# EAGLE board sensor_board009 (EAGLE 4.16)
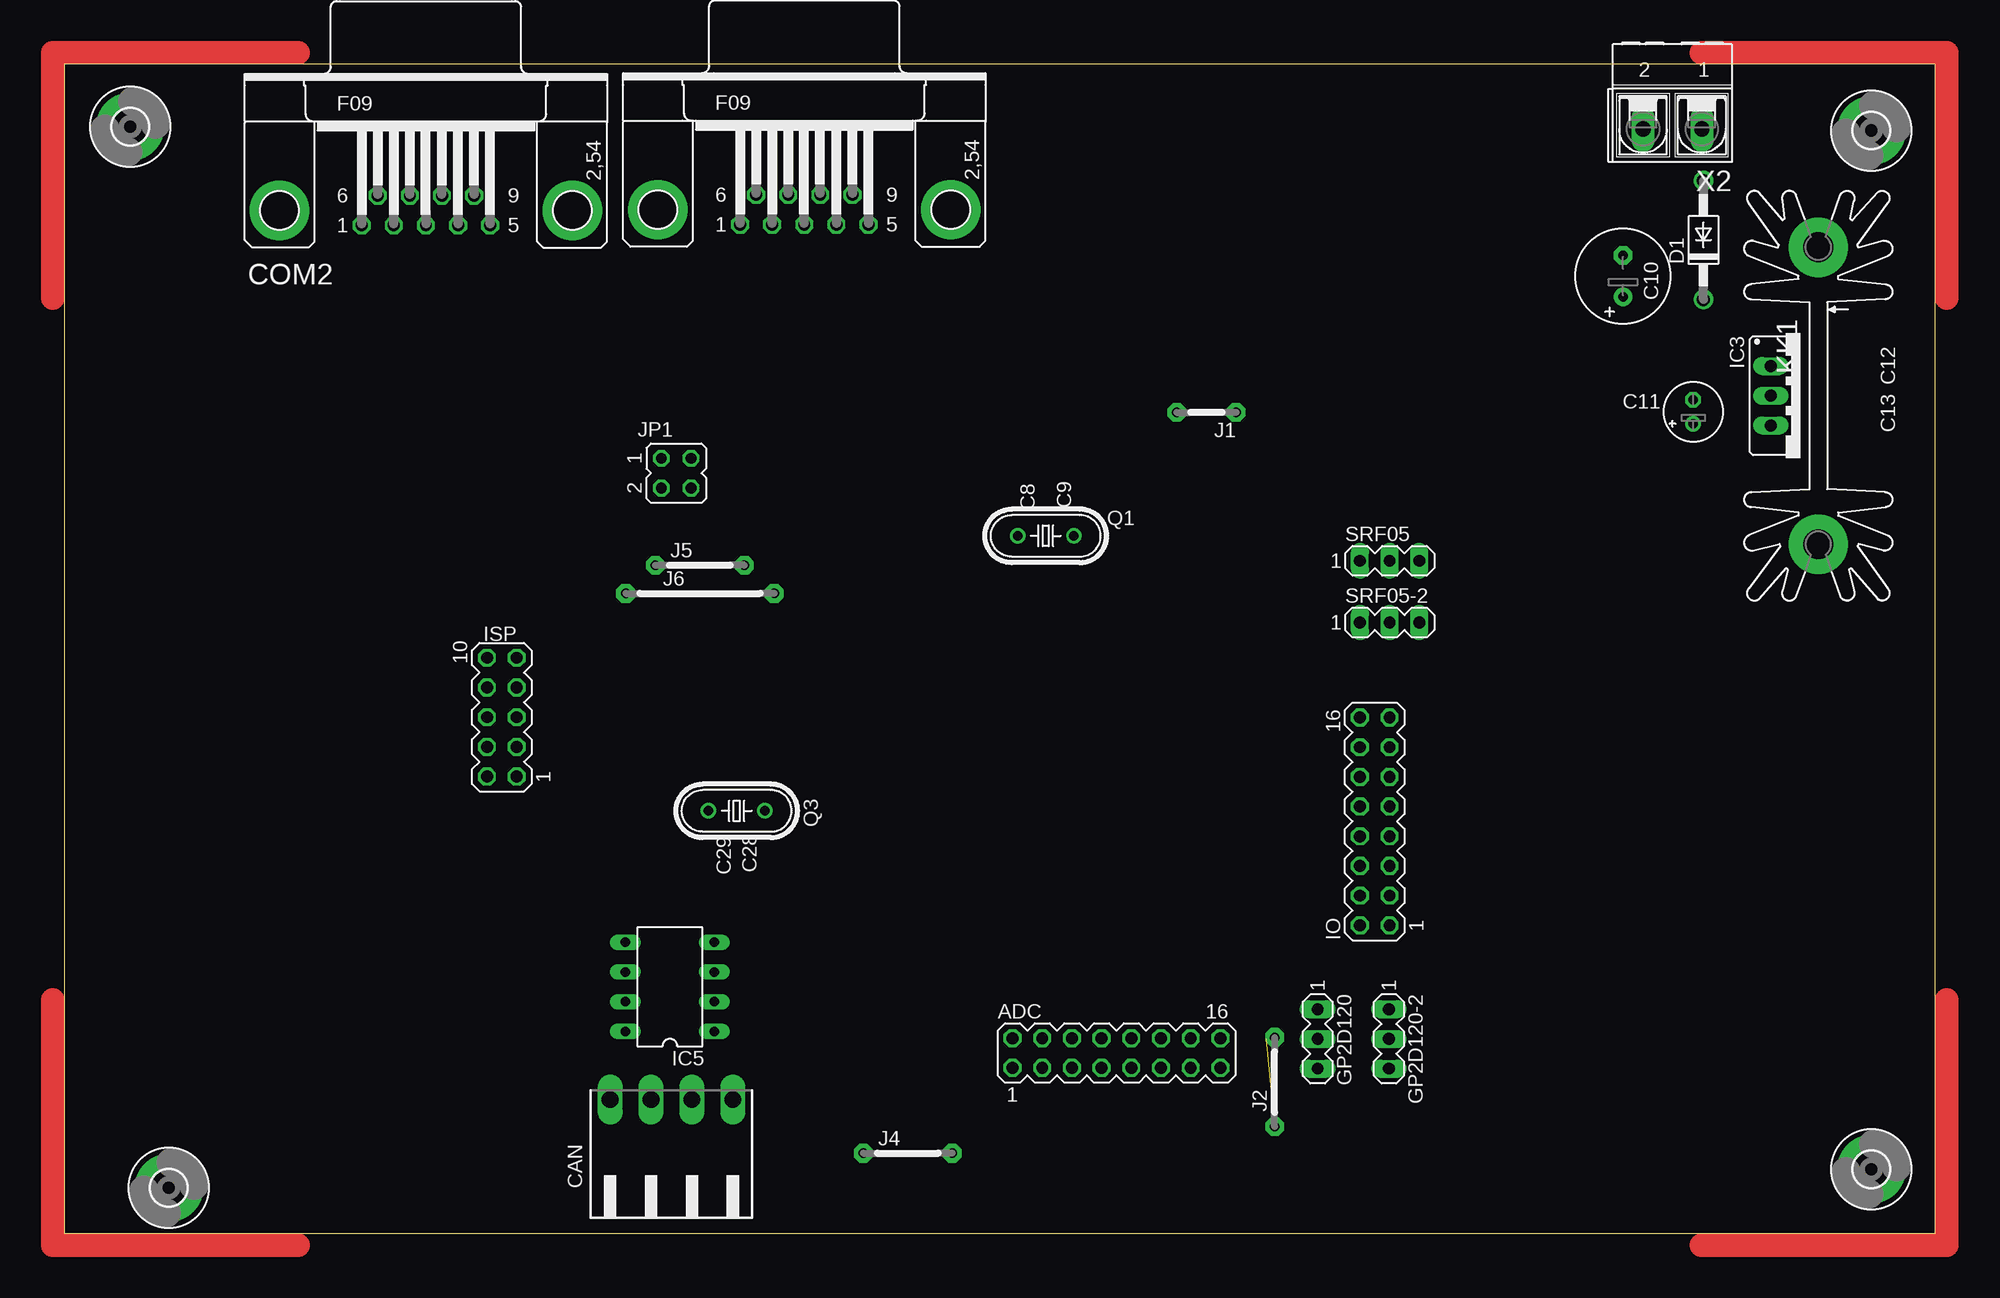
[diagram p0: board, top side]
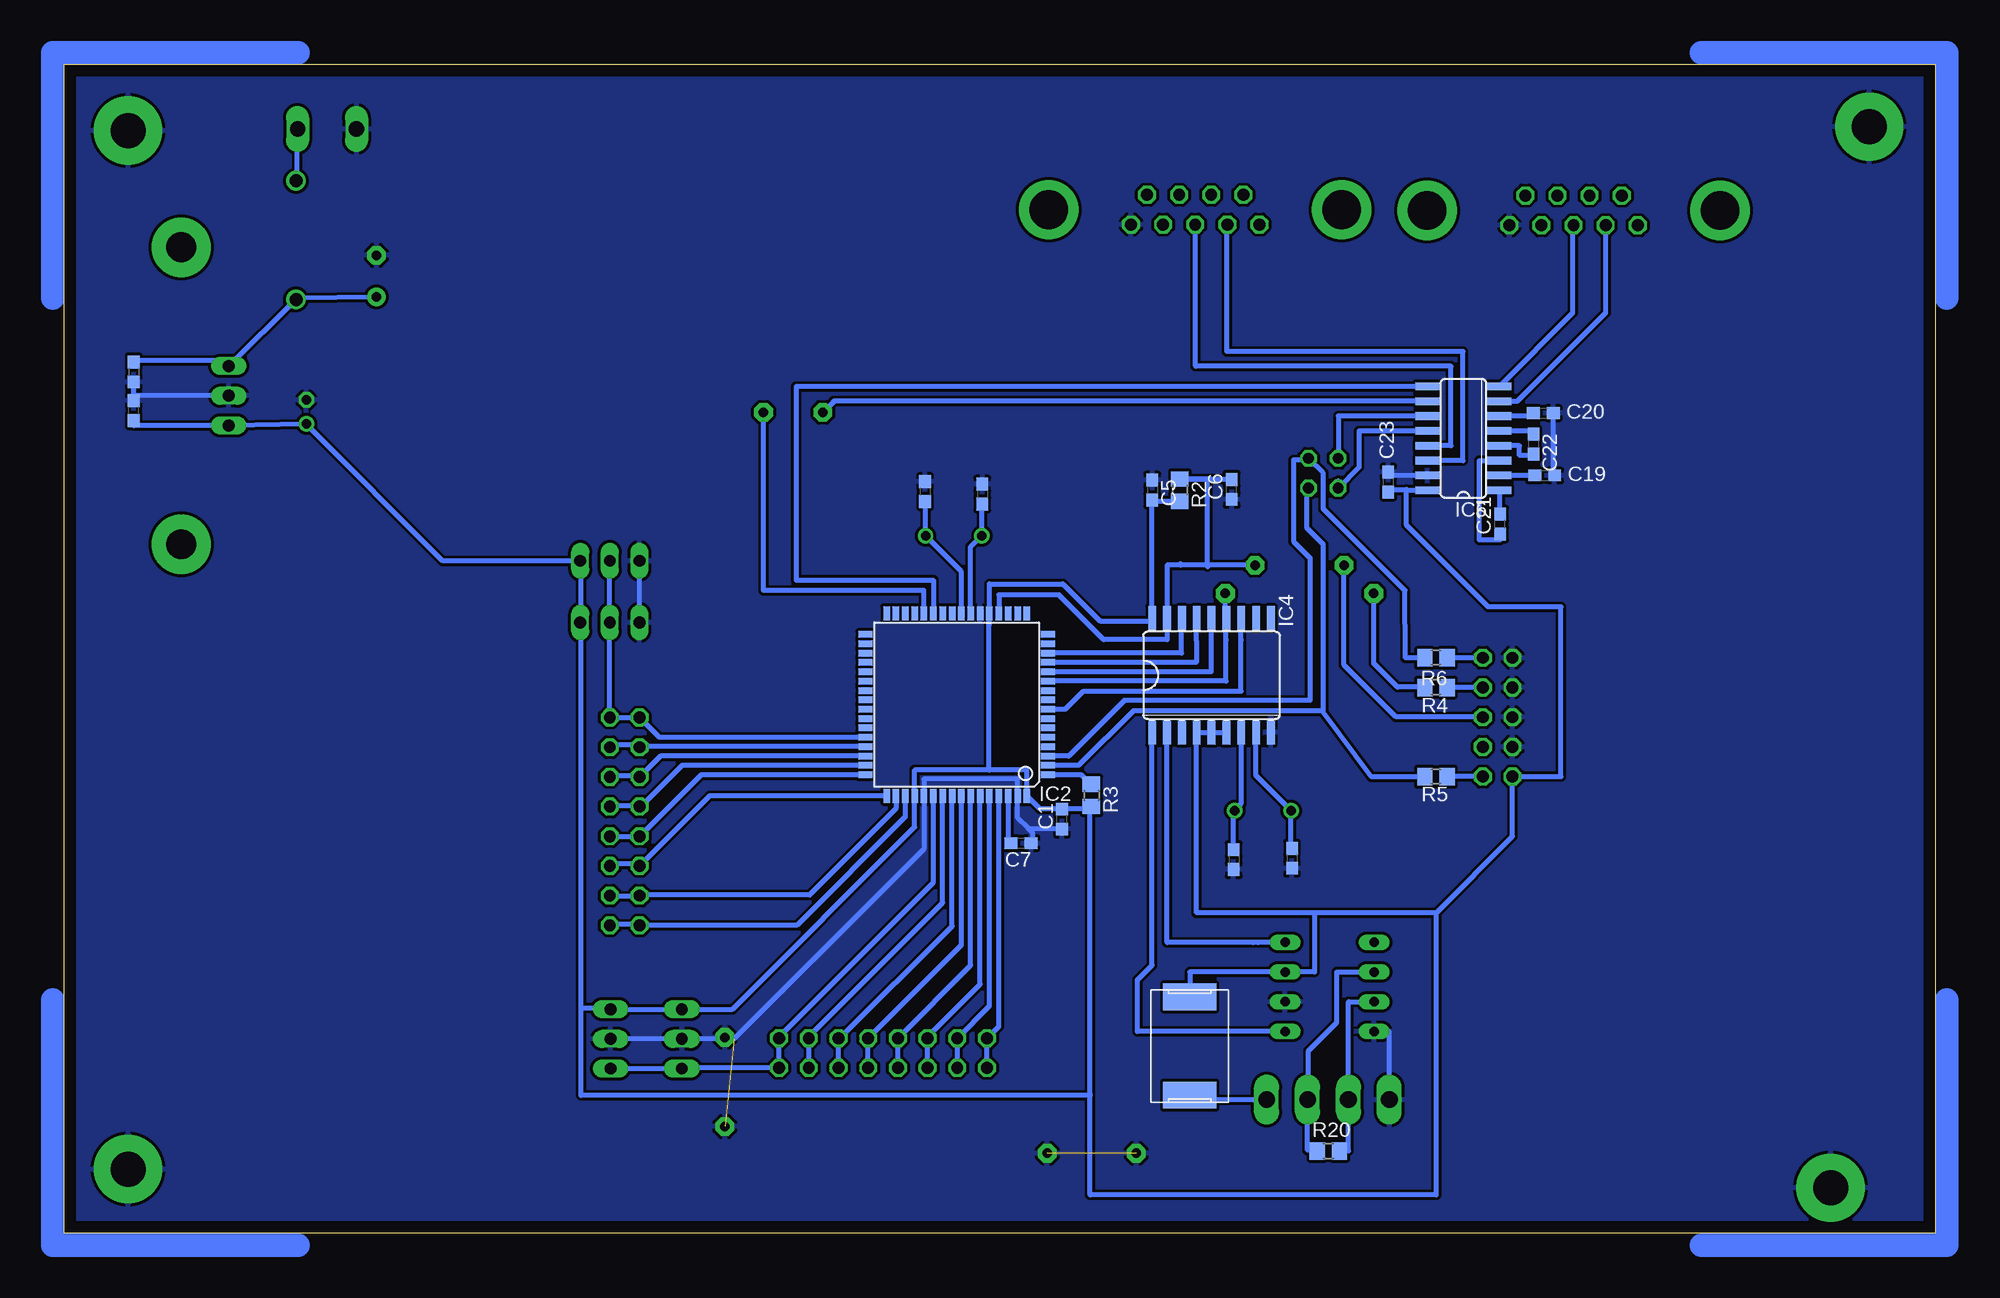
[diagram p1: board, bottom side, seen from below]

Size 160 x 100 mm. Coordinates in mm from the lower left corner, seen from the top.
Outline: 0,0 160,0 160,100 0,100 0,0
Copper layers (1*16): Top 0.035mm / dielectric 1.5mm / Bottom 0.035mm
Design rules "olimex_8mils": minimum track width 10mil, minimum drill 24mil, track to track 8mil, track to pad 8mil, pad to pad 8mil, via to via 8mil, smd to smd 8mil, copper to edge 40mil, drill to drill 10mil, minimum pad ring 10mil, minimum via ring 8mil, stop-mask expansion 0mil, vias tented up to drill 0mil, thermal gap 10mil

## Footprints (pad centres in the part's own frame; a part is rotated, then mirrored left to right if it is on the bottom)
MA08-2 = drill 1.016 octagon: 1 -8.89,-1.27; 2 -8.89,1.27; 3 -6.35,-1.27; 4 -6.35,1.27; 5 -3.81,-1.27; 6 -3.81,1.27; 7 -1.27,-1.27; 8 -1.27,1.27; 9 1.27,-1.27; 10 1.27,1.27; 11 3.81,-1.27; 12 3.81,1.27; 13 6.35,-1.27; 14 6.35,1.27; 15 8.89,-1.27; 16 8.89,1.27
C0603 = smd 1.1 x 1: 1 -0.85,0; 2 0.85,0
E3,5-8 = drill 0.813 pad 1.6 round: + -1.778,0 | drill 0.813 pad 1.6 octagon: - 1.778,0
E2-5 = drill 0.813 pad 1.27 round: + -1.016,0 | drill 0.813 pad 1.27 octagon: - 1.016,0
90-4 = drill 1.422 long: 1 -5.25,5.25; 2 -1.75,5.25; 3 1.75,5.25; 4 5.25,5.25
F09HP = drill 1.016 octagon: 1 -5.486,-1.27; 2 -2.743,-1.27; 3 0,-1.27; 4 2.743,-1.27; 5 5.486,-1.27; 6 -4.115,1.27; 7 -1.372,1.27; 8 1.372,1.27; 9 4.115,1.27 | drill 3.302 pad 5.08 round: G1 -12.522,0; G2 12.522,0
DO41-10 = drill 1.118 round: A 5.08,0; C -5.08,0
3425L = smd 2.29 x 4.57: P$1 -4.2,0; P$2 4.2,0
MA03-1 = drill 1.016 long: 1 -2.54,0; 2 0,0; 3 2.54,0
3,0-PAD = drill 3 pad 5.842 round: B3,0 0,0
TQFP64 = smd 1.194 x 0.559: 1 -7.8,6; 2 -7.8,5.2; 3 -7.8,4.4; 4 -7.8,3.6; 5 -7.8,2.8; 6 -7.8,2; 7 -7.8,1.2; 8 -7.8,0.4; 9 -7.8,-0.4; 10 -7.8,-1.2; 11 -7.8,-2; 12 -7.8,-2.8; 13 -7.8,-3.6; 14 -7.8,-4.4; 15 -7.8,-5.2; 16 -7.8,-6; 33 7.8,-6; 34 7.8,-5.2; 35 7.8,-4.4; 36 7.8,-3.6; 37 7.8,-2.8; 38 7.8,-2; 39 7.8,-1.2; 40 7.8,-0.4; 41 7.8,0.4; 42 7.8,1.2; 43 7.8,2; 44 7.8,2.8; 45 7.8,3.6; 46 7.8,4.4; 47 7.8,5.2; 48 7.8,6 | smd 0.559 x 1.194: 17 -6,-7.8; 18 -5.2,-7.8; 19 -4.4,-7.8; 20 -3.6,-7.8; 21 -2.8,-7.8; 22 -2,-7.8; 23 -1.2,-7.8; 24 -0.4,-7.8; 25 0.4,-7.8; 26 1.2,-7.8; 27 2,-7.8; 28 2.8,-7.8; 29 3.6,-7.8; 30 4.4,-7.8; 31 5.2,-7.8; 32 6,-7.8; 49 6,7.8; 50 5.2,7.8; 51 4.4,7.8; 52 3.6,7.8; 53 2.8,7.8; 54 2,7.8; 55 1.2,7.8; 56 0.4,7.8; 57 -0.4,7.8; 58 -1.2,7.8; 59 -2,7.8; 60 -2.8,7.8; 61 -3.6,7.8; 62 -4.4,7.8; 63 -5.2,7.8; 64 -6,7.8
78XXS = drill 1.016 long: GND 0,-2.54; IN -2.54,-2.54; OUT 2.54,-2.54
SO18L = smd 0.66 x 2.032: 1 -5.08,-4.902; 2 -3.81,-4.902; 3 -2.54,-4.902; 4 -1.27,-4.902; 5 0,-4.902; 6 1.27,-4.902; 7 2.54,-4.902; 8 3.81,-4.902; 9 5.08,-4.902; 10 5.08,4.902; 11 3.81,4.902; 12 2.54,4.902; 13 1.27,4.902; 14 0,4.902; 15 -1.27,4.902; 16 -2.54,4.902; 17 -3.81,4.902; 18 -5.08,4.902
DIL08 = drill 0.813 long: 1 -3.81,-3.81; 2 -1.27,-3.81; 3 1.27,-3.81; 4 3.81,-3.81; 5 3.81,3.81; 6 1.27,3.81; 7 -1.27,3.81; 8 -3.81,3.81
SO16 = smd 0.66 x 2.032: 1 -4.445,-3.073; 2 -3.175,-3.073; 3 -1.905,-3.073; 4 -0.635,-3.073; 5 0.635,-3.073; 6 1.905,-3.073; 7 3.175,-3.073; 8 4.445,-3.073; 9 4.445,3.073; 10 3.175,3.073; 11 1.905,3.073; 12 0.635,3.073; 13 -0.635,3.073; 14 -1.905,3.073; 15 -3.175,3.073; 16 -4.445,3.073
MA05-2 = drill 1.016 octagon: 1 -5.08,-1.27; 2 -5.08,1.27; 3 -2.54,-1.27; 4 -2.54,1.27; 5 0,-1.27; 6 0,1.27; 7 2.54,-1.27; 8 2.54,1.27; 9 5.08,-1.27; 10 5.08,1.27
05 = drill 0.813 pad 1.6 octagon: 1 -2.54,0; 2 2.54,0
07 = drill 0.813 pad 1.6 octagon: 1 -3.81,0; 2 3.81,0
12 = drill 0.813 pad 1.6 octagon: 1 -6.35,0; 2 6.35,0
JP2Q = drill 0.914 octagon: 1 -1.27,-1.27; 2 -1.27,1.27; 3 1.27,-1.27; 4 1.27,1.27
SK104 = drill 2.54 pad 5.08 round: A2,5 -12.7,-0.762; B2,5 12.7,-0.762
HC49U-V = drill 0.813 round: 1 -2.413,0; 2 2.413,0
R0805 = smd 1.3 x 1.5: 1 -0.95,0; 2 0.95,0
AK500/2-H = drill 1.321 long: 1 -2.515,0; 2 2.515,0

## Placement (x,y rotation side)
ADC  [MA08-2]  89.98,15.43 0 top
C1  100n  [C0603]  74.68,35.43 90 bottom
C5  100n  [C0603]  66.95,63.58 270 bottom
C6  100n  [C0603]  60.16,63.64 90 bottom
C7  100n  [C0603]  78.18,33.38 180 bottom
C8  22p  [C0603]  81.5,63.23 270 bottom
C9  22p  [C0603]  86.4,63.45 270 bottom
C10  220µF/25V  [E3,5-8]  133.3,81.88 90 top
C11  10µF/35V  [E2-5]  139.31,70.27 90 top
C12  100n  [C0603]  154.06,73.69 270 bottom
C13  100n  [C0603]  154.06,70.38 90 bottom
C19  100n  [C0603]  33.4,64.83 0 bottom
C20  100n  [C0603]  33.52,70.17 0 bottom
C21  100n  [C0603]  37.21,60.67 90 bottom
C22  100n  [C0603]  34.35,67.53 270 bottom
C23  100n  [C0603]  46.77,64.26 90 bottom
C28  22p  [C0603]  59.99,31.98 270 bottom
C29  22p  [C0603]  55,32.09 270 bottom
CAN  [90-4]  51.93,6.2 0 top
COM1  [F09HP]  63.28,87.57 0 top
COM2  [F09HP]  30.92,87.5 0 top
D1  1N4001  [DO41-10]  140.18,84.96 90 top
F2  3425L  [3425L]  63.75,16.03 90 bottom
GP2D120  [MA03-1]  107.19,16.64 270 top
GP2D120-2  [MA03-1]  113.28,16.64 270 top
H1  MOUNT-PAD-ROUND3.0  [3,0-PAD]  154.55,5.5 0 top
H2  MOUNT-PAD-ROUND3.0  [3,0-PAD]  5.64,94.67 0 top
H3  MOUNT-PAD-ROUND3.0  [3,0-PAD]  8.94,3.91 0 top
H4  MOUNT-PAD-ROUND3.0  [3,0-PAD]  154.55,94.34 0 top
IC2  MEGA128-A  [TQFP64]  83.68,45.24 180 bottom
IC3  [78XXS]  148.48,71.65 270 top
IC4  MCP2515-E/SO  [SO18L]  61.89,47.74 0 bottom
IC5  PCA82C250  [DIL08]  51.79,21.09 90 top
IC6  MAX3232CSE  [SO16]  40.35,68.01 90 bottom
IO  [MA08-2]  112.08,35.24 90 top
ISP  [MA05-2]  37.41,44.16 90 top
J1  J5MM  [05]  97.66,70.23 180 top
J2  J7MM  [07]  103.5,12.95 90 top
J4  J7MM  [07]  72.14,6.86 0 top
J5  J7MM  [07]  54.36,57.15 0 top
J6  J12MM  [12]  54.36,54.74 0 top
JP1  [JP2Q]  52.32,65.02 270 top
KK1  SK104  [SK104]  150.76,71.65 270 top
Q1  16MHz  [HC49U-V]  83.93,59.66 180 top
Q3  16MHz  [HC49U-V]  57.51,36.14 180 top
R2  10k  [R0805]  64.6,63.58 270 bottom
R3  1k  [R0805]  72.16,37.48 270 bottom
R4  4k7  [R0805]  42.68,46.69 180 bottom
R5  4k7  [R0805]  42.68,39.07 180 bottom
R6  4k7  [R0805]  42.68,49.24 180 bottom
R20  4k7  [R0805]  51.9,7.06 0 bottom
SRF05  [MA03-1]  113.35,57.53 0 top
SRF05-2  [MA03-1]  113.35,52.26 0 top
X2  [AK500/2-H]  137.53,94.46 180 top

## Library data of the parts
ADC GP2D120 GP2D120-2 IO ISP SRF05 SRF05-2 = con-lstb
C1 C5-C13 C19-C23 C28 C29 R2-R6 R20 = rcl
CAN = con-weidmueller-sl35
COM1 COM2 = con-subd
D1 = diode
F2 = ptc-littlefuse
H1-H4 = holes
IC2 = atmel
IC3 = v-reg
IC4 = mcp2515
IC5 = micro-philips
IC6 = maxim
J1 J2 J4-J6 JP1 = jumper
KK1 = heatsink
Q1 Q3 = crystal
X2 = con-ptr500

## Nets
CAN_INT: IC2.8 IC4.12
CS: IC2.14 IC4.16
GND: C1.1 C5.1 C6.1 C7.1 C8.1 C9.1 C10.- C11.- C12.2 C13.2 C19.2 C20.2 C23.2 C28.2 C29.2 CAN.1 COM1.5 COM2.5 GP2D120-2.2 GP2D120.2 H1.B3,0 H2.B3,0 H3.B3,0 H4.B3,0 IC2.22 IC2.53 IC2.63 IC3.GND IC4.9 IC5.2 IC5.8 IC6.15 ISP.4 ISP.6 ISP.8 ISP.10 J2.1 J2.2 J4.1 J4.2 SRF05-2.1 SRF05.1 X2.2
MISO: IC2.13 IC4.15
MOSI: IC2.12 IC4.14
N$1: ADC.1 ADC.2 IC2.61
N$2: IC4.1 IC5.1
N$3: ADC.3 ADC.4 IC2.60
N$4: ADC.5 ADC.6 IC2.59
N$5: C7.2 IC2.62
N$6: C9.2 IC2.24 Q1.1
N$7: C8.2 IC2.23 Q1.2
N$8: C10.+ C12.1 D1.C IC3.IN
N$9: ADC.7 ADC.8 IC2.58
N$10: D1.A X2.1
N$11: ADC.9 ADC.10 IC2.57
N$12: COM1.2 IC6.14
N$13: COM1.3 IC6.13
N$14: ADC.11 ADC.12 IC2.56
N$15: ADC.13 ADC.14 IC2.55
N$16: CAN.4 F2.P$1
N$17: C21.2 IC6.1
N$19: ADC.15 ADC.16 GP2D120-2.3 GP2D120.3 IC2.54
N$20: IC2.45 IO.13 IO.14
N$21: IC4.2 IC5.4
N$22: ISP.9 R6.1
N$23: CAN.3 IC5.6 R20.1
N$24: IC2.46 IO.11 IO.12
N$25: ISP.1 R5.1
N$26: IC2.1 R3.1
N$27: IC2.28 J1.1
N$28: IC2.47 IO.9 IO.10
N$29: ISP.7 R4.1
N$30: C22.2 IC6.4
N$31: IC2.48 IO.7 IO.8
N$32: IC2.49 IO.5 IO.6
N$33: IC2.2 JP1.4 R5.2
N$34: IC2.50 IO.3 IO.4
N$35: IC2.51 IO.1 IO.2
N$36: C22.1 IC6.5
N$37: C21.1 IC6.3
N$38: ISP.5 J5.1
N$40: COM2.2 IC6.7
N$41: COM2.3 IC6.8
N$43: C19.1 IC6.2
N$44: IC2.3 JP1.2 R6.2
N$46: C20.1 IC6.6
N$47: IC2.44 IO.15 IO.16 SRF05-2.2 SRF05.2
N$48: J6.1 R4.2
N$53: C28.1 IC4.7 Q3.1
N$54: C29.1 IC4.8 Q3.2
N$59: CAN.2 IC5.7 R20.2
RST: C6.2 IC2.20 IC4.17 J5.2 R2.1
RXD: IC6.12 JP1.3
RXD1: IC2.27 IC6.9
SCK: IC2.11 IC4.13 J6.2
TXD: IC6.11 JP1.1
TXD1: IC6.10 J1.2
VCC: C1.2 C5.2 C11.+ C13.1 C23.1 F2.P$2 GP2D120-2.1 GP2D120.1 IC2.21 IC2.52 IC2.64 IC3.OUT IC4.4 IC4.5 IC4.6 IC4.18 IC5.3 IC6.16 ISP.2 R2.2 R3.2 SRF05-2.3 SRF05.3

## Tracks (layer width: path | path; a pad name or v marks a point on that pad's centre or on a via)
CAN_INT
  Bottom 0.406: 59.37,50.74 59.37,50.8 | 59.37,50.74 IC4.12 | IC2.8 74.42,44.84 72.9,46.35 59.37,46.36 59.37,50.74
CS
  Bottom 0.406: 64.45,51.69 64.45,51.75 | 64.45,51.69 IC4.16 | IC2.14 64.45,49.64 64.45,51.69
GND  (2 unrouted)
  Bottom 0.406: C20.2 32.64,70.17 32.64,64.83 C19.2 | C23.2 46.74,65.11 46.74,64.83 IC6.15 | IC5.8 48.01,17.27 | IC5.8 | CAN.1 46.68,17.27 IC5.8 | 77.6,34.67 77.22,34.29 77.22,33.4 77.24,33.38 C7.1 | 77.6,34.67 78.48,35.55 IC2.63 78.48,38.86 86.48,38.86 IC2.53 86.48,32.9 102.74,16.64 GP2D120.2 GP2D120-2.2 | C1.1 77.51,34.58 77.6,34.67 | SRF05-2.1 SRF05.1 110.87,57.53 | IC3.GND 154.05,71.65 C13.2 | C12.2 C13.2 | C13.2
  pour Top (isolate 0.254): -78.13,87.17 -19.47,85.98 -20.89,0.58 -79.55,1.96
  pour Bottom (isolate 0.254): 166.98,110.4 -13.96,107.16 -11.72,-8 165.1,-5.93
MISO
  Bottom 0.406: 63.18,50.74 63.18,50.8 | 63.18,50.74 IC4.15 | IC2.13 63.18,48.84 63.18,50.74
MOSI
  Bottom 0.406: 61.91,50.74 61.91,50.8 | 61.91,50.74 IC4.14 | IC2.12 61.91,48.04 61.91,50.74
N$1
  Bottom 0.406: IC2.61 80.08,17.71 ADC.2 81.15,16.64 81.09,16.57 ADC.1
N$2
  Bottom 0.406: IC5.1 68.24,17.27 68.24,21.68 66.97,22.95 IC4.1
N$3
  Bottom 0.406: IC2.60 80.88,19.45 ADC.4 83.63,14.41 83.69,14.35 83.63,14.29 ADC.3
N$4
  Bottom 0.406: IC2.59 81.68,21.32 86.17,16.83 ADC.6 86.11,16.64 86.17,16.57 ADC.5
N$5
  Bottom 0.406: C7.2 79.06,33.4 79.25,33.4 79.25,37.41 IC2.62
N$6
  Bottom 0.406: 86.35,59.68 86.36,59.69 | 86.35,59.68 Q1.1 86.36,62.6 | IC2.24 83.28,56.61 86.35,59.68 | 86.36,62.6 86.36,62.74 | 86.36,62.6 C9.2
N$7
  Bottom 0.406: IC2.23 82.48,58.74 81.53,59.69 81.52,59.68 Q1.2 81.53,59.66 81.53,62.38 | 81.53,62.38 81.53,62.48 | 81.53,62.38 C8.2
N$8
  Bottom 0.406: C12.1 154.06,74.68 145.94,74.68 IC3.IN 140.21,79.88 D1.C 140.08,80.01 C10.+
N$9
  Bottom 0.406: IC2.58 82.48,22.93 ADC.8 88.71,14.29 88.77,14.22 ADC.7
N$10
  Bottom 0.406: 140.08,94.46 140.08,94.49 | 140.08,94.46 X2.1 | D1.A 140.08,90.04 140.08,94.46
N$11
  Bottom 0.406: IC2.57 83.28,24.67 91.19,16.76 ADC.10 ADC.9
N$12
  Bottom 0.406: IC6.14 40.39,66.1 40.39,75.44 60.58,75.44 60.58,86.3 | 60.58,86.3 60.58,86.36 | 60.58,86.3 COM1.2
N$13
  Bottom 0.406: IC6.13 41.4,67.37 41.4,74.17 63.25,74.17 63.25,86.3 COM1.3
N$14
  Bottom 0.406: IC2.56 84.08,26.28 93.73,16.64 ADC.12 93.79,14.29 93.85,14.22 ADC.11
N$15
  Bottom 0.406: IC2.55 84.88,28.28 96.39,16.76 ADC.14 96.39,16.64 96.33,16.57 ADC.13
N$16
  Bottom 0.406: 63.75,11.94 F2.P$1 63.75,11.45 CAN.4
N$17
  Bottom 0.406: IC6.1 37.21,63.56 C21.2
N$18
  Top 2: 20,-1 -1,-1 -1,20
N$19
  Bottom 0.406: IC2.54 85.68,30.02 98.93,16.76 ADC.16 98.87,14.29 98.93,14.22 ADC.15 107.25,14.16 107.31,14.1 GP2D120.3 GP2D120-2.3
N$20
  Bottom 0.406: IC2.45 110.72,41.64 110.74,41.66 IO.14 110.87,41.66 110.87,41.78 113.16,41.78 IO.13
N$21
  Bottom 0.406: IC5.4 57.91,24.89 | 57.91,24.89 58.33,24.89 | IC4.2 65.7,24.89 57.91,24.89
N$22
  Bottom 0.406: 41.66,49.24 R6.1 | ISP.9 41.66,49.24 | 41.66,49.24 41.66,49.28
N$23
  Bottom 0.406: 53.59,11.43 53.59,11.45 CAN.3 | 52.85,7.11 52.83,7.11 | R20.1 52.85,7.11 | CAN.3 53.68,7.11 52.85,7.11 | IC5.6 51.18,22.36 51.18,18.03 53.59,15.62 53.59,11.43 | 53.59,11.43 53.66,11.43 CAN.3
N$24
  Bottom 0.406: IC2.46 109.02,40.84 IO.12 110.87,39.12 113.41,39.12 IO.11
N$25
  Bottom 0.406: 41.53,39.08 41.53,39.06 R5.1 | ISP.1 41.53,39.08 | 41.53,39.08 41.53,39.12
N$26
  Bottom 0.406: 72.16,38.38 72.14,38.35 | R3.1 72.16,38.38 | IC2.1 73.02,39.24 72.16,38.38
N$27
  Bottom 0.406: IC2.28 86.48,54.99 100.2,54.99 J1.1
N$28
  Bottom 0.406: IC2.47 107.16,40.04 110.74,36.45 IO.10 110.87,36.58 113.28,36.58 IO.9
N$29
  Bottom 0.406: 41.66,46.7 41.66,46.69 R4.1 | ISP.7 41.66,46.7 | 41.66,46.7 41.66,46.74
N$30
  Bottom 0.406: IC6.4 35.56,67.37 35.56,66.55 34.42,66.55 34.42,66.68 C22.2
N$31
  Bottom 0.406: IC2.48 105.54,39.24 IO.8 110.87,33.91 113.28,33.91 IO.7
N$32
  Bottom 0.406: IC2.49 104.8,37.44 IO.6 110.87,31.5 110.87,31.62 113.16,31.62 IO.5
N$33
  Bottom 0.406: IC2.2 73.25,40.04 68.58,44.7 52.32,44.7 | 53.47,63.75 JP1.4 53.72,63.75 53.72,60.33 52.32,58.93 52.32,44.7 | 52.32,44.7 52.32,44.58 48.21,39.06 R5.2
N$34
  Bottom 0.406: IC2.50 88.88,36.34 96.27,28.96 110.87,28.96 IO.4 110.87,28.83 113.28,28.83 IO.3
N$35
  Bottom 0.406: IC2.51 88.08,35.62 97.35,26.35 IO.2 110.87,26.42 113.28,26.42 IO.1
N$36
  Bottom 0.406: C22.1 34.42,68.38 34.42,68.64 IC6.5
N$37
  Bottom 0.406: IC6.3 38.99,66.1 38.99,59.31 37.21,59.31 C21.1
N$38
  Bottom 0.406: J5.1 50.55,48.64 46.1,44.2 38.73,44.2 38.68,44.15 | 38.68,44.15 38.61,44.07 | ISP.5 38.68,44.15
N$39
  Top 2: 140,-1 161,-1 161,20
N$40
  Bottom 0.406: IC6.7 35.75,71.18 28.18,78.75 COM2.2
N$41
  Bottom 0.406: COM2.3 30.99,86.23 30.99,78.74 IC6.8
N$43
  Bottom 0.406: C19.1 34.16,64.83 | 34.16,64.83 IC6.2 | 34.16,64.83 34.16,64.9
N$44
  Bottom 0.406: IC2.3 74.1,40.84 69.34,45.59 53.47,45.59 53.47,57.78 54.86,59.18 54.86,66.17 53.59,66.17 JP1.2 52.32,65.02 52.32,61.98 45.34,54.99 45.3,49.24 R6.2
N$45
  Top 2: 20,101 -1,101 -1,80
N$46
  Bottom 0.406: 34.42,70.17 34.42,70.23 | C20.1 34.42,70.17 | IC6.6 34.42,69.91 34.42,70.17
N$47
  Bottom 0.406: IC2.44 109.11,42.44 IO.16 110.87,44.07 113.41,44.07 | 113.41,44.07 113.54,44.07 | 113.41,44.07 IO.15 SRF05-2.2 | SRF05-2.2 113.35,52.32 113.28,52.32 | 113.35,57.66 SRF05.2 | SRF05-2.2 113.35,57.66 | 113.35,57.66 113.41,57.66
N$48
  Bottom 0.406: J6.1 48.01,48.77 45.97,46.74 43.56,46.74 43.61,46.69 R4.2
N$51
  Top 2: 161,80 161,101 140,101
N$53
  Bottom 0.406: IC4.7 59.35,36.79 59.94,36.2 59.92,36.17 Q3.1 59.92,36.09 59.99,36.02 C28.1
N$54
  Bottom 0.406: IC4.8 58.08,39.15 55.09,36.17 Q3.2 55.09,33.25 54.99,33.15 55,33.13 C29.1
N$55
  Bottom 2: 20,-1 -1,-1 -1,20
N$56
  Bottom 2: 140,-1 161,-1 161,20
N$57
  Bottom 2: 20,101 -1,101 -1,80
N$58
  Bottom 2: 161,80 161,101 140,101
N$59
  Bottom 0.406: R20.2 50.16,7.06 50.16,11.45 CAN.2 50.18,19.81 IC5.7 | IC5.7 47.88,19.81 | IC5.7
RST
  Bottom 0.406: IC2.20 80.08,54.61 74.93,54.61 71.12,50.8 65.7,50.8 IC4.17 65.7,57.15 64.52,57.15 | J5.2 62.23,57.15 | 62.23,57.15 64.52,57.15 | 64.52,57.15 64.52,57.28 64.55,57.28 | 64.61,64.52 64.64,64.52 | 64.61,64.52 R2.1 62.23,64.53 62.23,57.15 | C6.2 60.16,64.52 64.61,64.52 | 62.23,57.15 62.23,57.02
RXD
  Bottom 0.406: 51.05,64.39 JP1.3 49.28,65.53 49.28,68.64 IC6.12
RXD1
  Bottom 0.406: IC6.9 97.41,72.45 97.41,55.88 85.68,55.88 IC2.27
SCK
  Bottom 0.406: 60.64,50.74 60.64,50.8 | 60.64,50.74 IC4.13 60.71,52.64 J6.2 | IC2.11 60.64,47.24 60.64,50.74
TXD
  Bottom 0.406: IC6.11 51.05,69.91 JP1.1
TXD1
  Bottom 0.406: IC6.10 94.23,71.18 94.23,71.12 J1.2
VCC
  Bottom 0.406: 45.21,63.56 46.74,63.56 46.74,63.5 | 45.21,63.56 IC6.16 | 46.74,63.5 46.74,63.41 C23.1 46.77,63.5 46.74,63.5 | F2.P$2 63.75,22.36 IC5.3 53.09,22.35 53.09,27.43 | 72.26,36.32 72.26,36.43 R3.2 | 72.26,36.32 74.64,36.32 C1.2 74.68,36.32 76.56,36.32 IC2.64 77.68,39.62 80.9,39.62 | 80.9,39.62 87.28,39.62 IC2.52 87.28,34.77 102.87,19.18 107.31,19.18 | GP2D120-2.1 113.41,19.18 | GP2D120-2.1 107.31,19.18 | 107.31,19.18 GP2D120.1 | 115.82,52.32 SRF05-2.3 | 115.82,52.32 115.82,57.47 SRF05.3 127.64,57.53 139.32,69.22 | 113.28,19.3 113.16,19.3 | 113.28,19.3 GP2D120-2.1 | 115.82,19.3 115.82,52.32 | 115.82,19.3 113.28,19.3 | 145.94,69.09 145.92,69.09 | 145.94,69.09 IC3.OUT 139.32,69.22 | C13.1 154.06,69.09 145.94,69.09 | 139.32,69.22 C11.+ 139.31,69.23 139.32,69.22 | 72.26,11.94 72.26,11.81 115.82,11.81 115.82,19.3 | 72.26,11.94 72.26,36.32 | 53.09,27.43 63.16,27.43 IC4.4 63.25,42.84 | 80.9,39.62 80.9,52.07 | 80.9,52.07 80.9,52.39 | 80.9,52.07 80.9,53.04 IC2.21 80.88,55.56 74.61,55.56 71.44,52.39 66.99,52.39 66.97,52.41 IC4.18 66.97,62.74 C5.2 | 42.67,27.43 53.09,27.43 | 42.67,27.43 42.67,3.3 72.26,3.3 72.26,11.94 | 45.21,63.56 45.21,63.63 | 45.21,63.56 45.21,60.58 38.23,53.59 32,53.59 32,39.08 ISP.2 36.14,33.96 42.67,27.43 | C5.2 66.93,62.74 | C5.2 66.93,62.73 66.93,62.74 | R2.2 66.93,62.63 66.93,62.74 | 61.85,42.84 IC4.5 63.25,42.84 | 61.85,42.84 IC4.6 | 61.85,42.84 61.85,42.8 | 63.25,42.84 63.25,42.8